# EAGLE board A T Junction Box V1_0 (EAGLE 8.4.0)
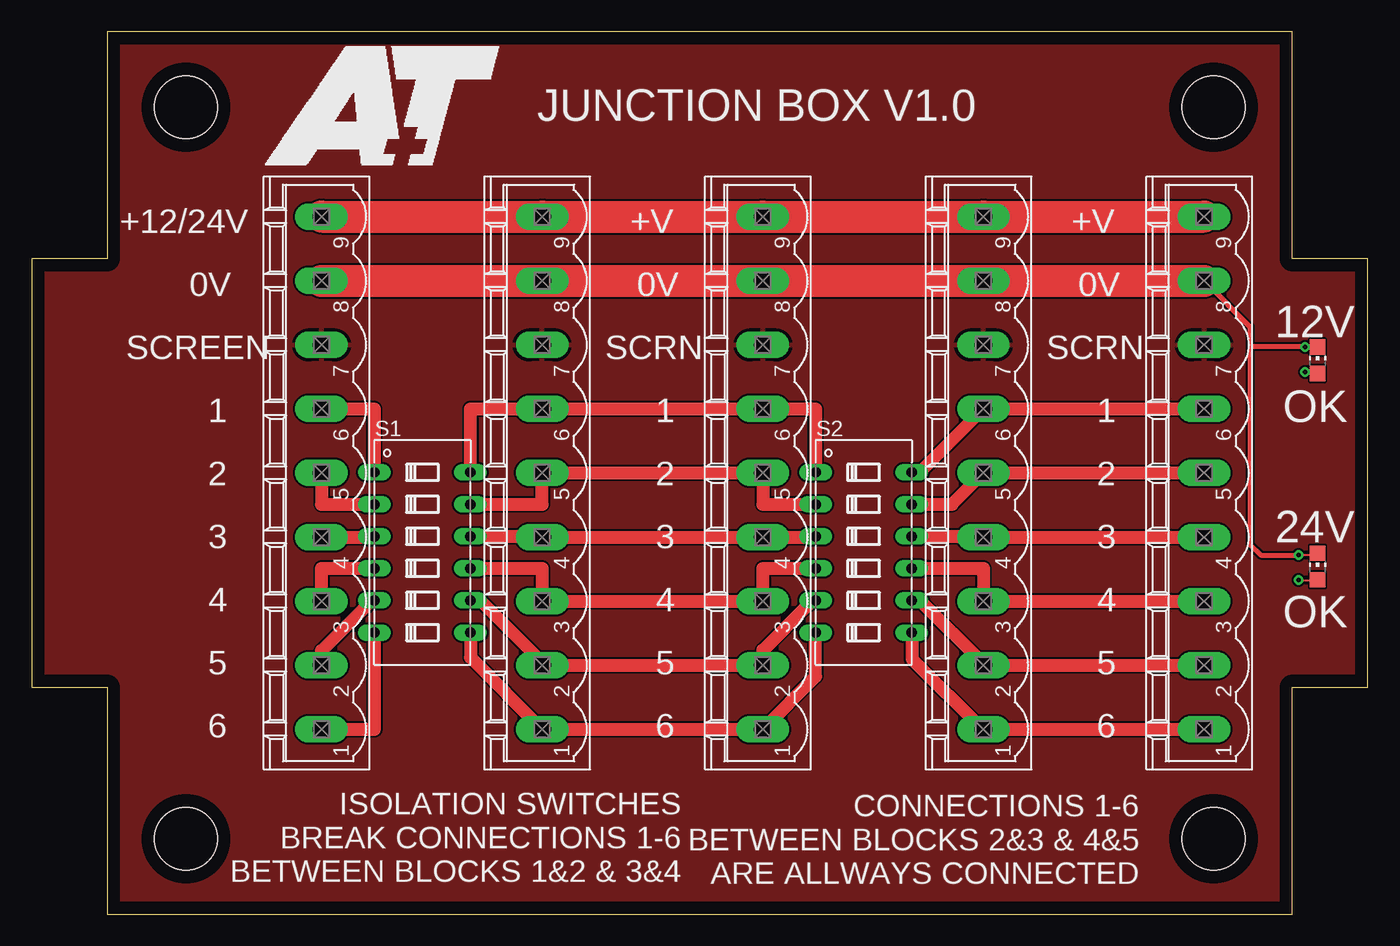
[diagram p0: board, top side]
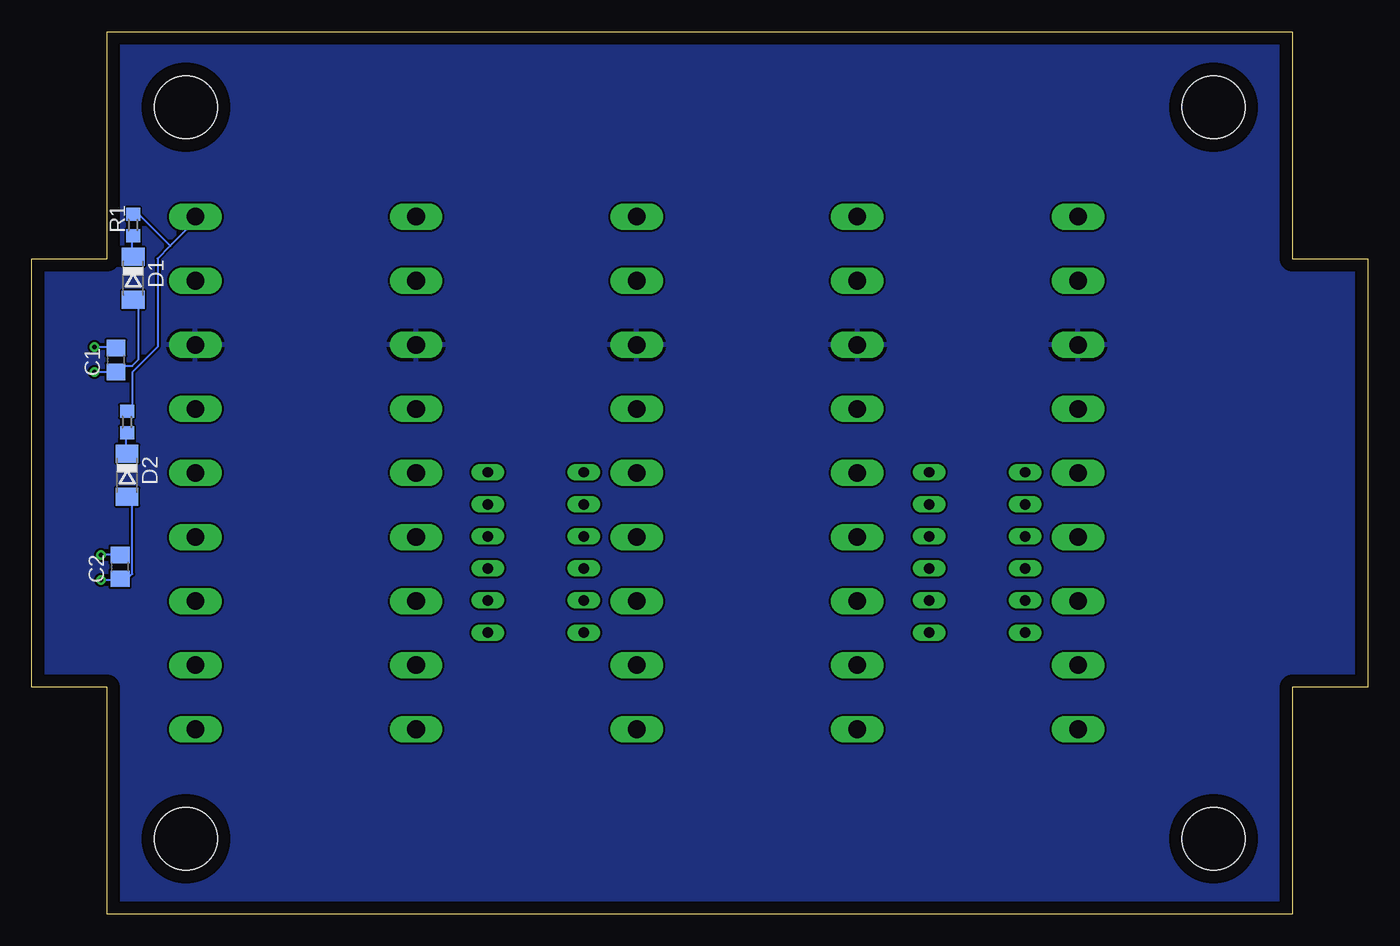
[diagram p1: board, bottom side, seen from below]

Size 106 x 70 mm. Coordinates in mm from the lower left corner, seen from the top.
Outline: 6,0 100,0 100,18 106,18 106,52 100,52 100,70 6,70 6,52 0,52 0,18 6,18 6,0
Copper layers (1*16): Top 0.035mm / dielectric 1.5mm / Bottom 0.035mm
Design rules "default": minimum track width 6mil, minimum drill 0.35mm, track to track 6mil, track to pad 6mil, pad to pad 6mil, via to via 6mil, smd to smd 6mil, copper to edge 40mil, drill to drill 6mil, minimum pad ring 10mil, minimum via ring 8mil, stop-mask expansion 4mil, vias tented up to drill 0mil, thermal gap 10mil
Holes 5 mm at 12.25,6 93.75,6 93.75,64 12.25,64

## Footprints (pad centres in the part's own frame; a part is rotated, then mirrored left to right if it is on the bottom)
C0805 = smd 1.3 x 1.5: 1 -0.95,0; 2 0.95,0
SOD80C = smd 1.4 x 1.8: A 1.7,0; C -1.7,0
CHIP-LED0805 = smd 1.2 x 1.2: A 0,-1.05; C 0,1.05
R0603 = smd 1 x 1.1: 1 -0.85,0; 2 0.85,0
DIP06YL = drill 0.813 long: 1 -6.35,-3.81; 2 -3.81,-3.81; 3 -1.27,-3.81; 4 1.27,-3.81; 5 3.81,-3.81; 6 6.35,-3.81; 7 6.35,3.81; 8 3.81,3.81; 9 1.27,3.81; 10 -1.27,3.81; 11 -3.81,3.81; 12 -6.35,3.81
MSTBV9 = drill 1.397 long: 1 -20.32,0; 2 -15.24,0; 3 -10.16,0; 4 -5.08,0; 5 0,0; 6 5.08,0; 7 10.16,0; 8 15.24,0; 9 20.32,0

## Placement (x,y rotation side)
C1  100n 50V  [C0805]  99.3,43.96 90 bottom
C2  100n 50V  [C0805]  98.98,27.56 90 bottom
D1  [SOD80C]  97.94,50.44 270 bottom
D2  [SOD80C]  98.42,34.82 270 bottom
LED1  [CHIP-LED0805]  102,43.94 0 top
LED2  [CHIP-LED0805]  102,27.58 0 top
R1  1k  [R0603]  97.94,54.66 90 bottom
R2  1k  [R0603]  98.42,39.04 90 bottom
S1  [DIP06YL]  31,28.7 270 top
S2  [DIP06YL]  66,28.7 270 top
X1  MSTBV9  [MSTBV9]  23,35 90 top
X2  MSTBV9  [MSTBV9]  40.5,35 90 top
X3  MSTBV9  [MSTBV9]  58,35 90 top
X4  MSTBV9  [MSTBV9]  75.5,35 90 top
X5  MSTBV9  [MSTBV9]  93,35 90 top

## Library data of the parts
C1 C2 R1 R2 = rcl
D1 D2 = diode
LED1 LED2 = led
S1 S2 = switch-dil; OC_FARNELL: unknown; OC_NEWARK: unknown
X1-X5 = con-phoenix-508; MF: FARNELL; MPN: MSTBVA2,5/9-5,08; OC_FARNELL: 3705328; OC_NEWARK: 71C4149

## Nets
GND: C1.2 C2.2 LED1.C LED2.C X1.8 X2.8 X3.8 X4.8 X5.8
N$1: S1.7 S2.6 X2.1 X3.1
N$2: S1.8 S2.5 X2.2 X3.2
N$3: S1.9 S2.4 X2.3 X3.3
N$4: S1.10 S2.3 X2.4 X3.4
N$5: S1.11 S2.2 X2.5 X3.5
N$6: S1.12 S2.1 X2.6 X3.6
N$8: S1.3 X1.4
N$9: R1.2 R2.2 X1.9 X2.9 X3.9 X4.9 X5.9
N$10: S2.7 X4.1 X5.1
N$11: S2.8 X4.2 X5.2
N$12: S2.9 X4.3 X5.3
N$15: S2.12 X4.6 X5.6
N$16: S1.6 X1.1
N$17: S1.5 X1.2
N$18: S1.4 X1.3
N$19: S2.11 X4.5 X5.5
N$20: S1.2 X1.5
N$21: S1.1 X1.6
N$22: C1.1 D1.A LED1.A
N$23: D1.C R1.1
N$24: C2.1 D2.A LED2.A
N$25: D2.C R2.1
N$26: S2.10 X4.4 X5.4
SCREEN: X1.7 X2.7 X3.7 X4.7 X5.7

## Tracks (layer width: path | path; a pad name or v marks a point on that pad's centre or on a via)
GND  (via drill 0.35)
  Top 0.152: v100.5,28.5 101.5,28.5 LED2.C 101.5,29 | v101,45 LED1.C
  Top 0.406: X5.8 96.64,46.6 96.64,45.12 | v101,45 96.76,45 96.64,45.12 | 96.64,45.12 96.64,29.36 97.52,28.48 100.48,28.48 v100.5,28.5
  Top 2.54: X1.8 X2.8 X3.8 X4.8 X5.8
  Bottom 0.152: v100.5,28.5 99,28.5 C2.2 | v101,45 99.5,45 C1.2
N$1
  Top 1.016: S1.7 34.81,20.37 X2.1 X3.1 62.19,18.87 S2.6
N$2
  Top 1.016: S1.8 35.59,24.89 40.5,19.98 X2.2 X3.2 58,20.96 61.6,24.56 61.6,24.8 62.1,24.8 S2.5
N$3
  Top 1.016: S1.9 40.5,27.43 X2.3 X3.3 58,27.44 S2.4
N$4
  Top 1.016: S1.10 40.5,29.97 X2.4 X3.4 62.19,29.92 S2.3
N$5
  Top 1.016: S1.11 40.5,32.51 X2.5 X3.5 58,32.51 S2.2
N$6
  Top 1.016: S1.12 34.81,40.08 X2.6 X3.6 62.19,40.08 S2.1
N$8
  Top 1.016: X1.4 27.19,29.92 S1.3
N$9
  Top 2.54: X1.9 X2.9 X3.9 X4.9 X5.9
  Bottom 0.152: 95,53 93,55 X5.9 | 95,53 96,52 96,45 98,43 98,40 R2.2 | 95,53 97.5,55.5 R1.2
N$10
  Top 1.016: S2.7 69.84,22.32 69.84,20.24 75.4,14.68 X4.1 X5.1
N$11
  Top 1.016: S2.8 70.48,24.88 75.5,19.86 X4.2 X5.2
N$12
  Top 1.016: S2.9 75.5,27.43 X4.3 X5.3
N$15
  Top 1.016: S2.12 70.47,35.05 X4.6 X5.6
N$16
  Top 1.016: X1.1 27.2,14.68 S1.6
N$17
  Top 1.016: X1.2 23,20.92 26.48,24.4 26.48,24.89 S1.5
N$18
  Top 1.016: X1.3 23,27.43 S1.4
N$19
  Top 1.016: S2.11 73.01,32.51 X4.5 X5.5
N$20
  Top 1.016: X1.5 23,32.51 S1.2
N$21
  Top 1.016: X1.6 27.19,40.08 S1.1
N$22  (via drill 0.35)
  Top 0.152: v101,43 102,43 LED1.A
  Bottom 0.152: v101,43 99.5,43 C1.1 99,43.5 98,43.5 97.5,44 97.5,48.5 D1.A
N$23
  Bottom 0.152: R1.1 98,53.5 98,52.5 D1.C
N$24  (via drill 0.35)
  Top 0.152: v100.5,26.5 101.5,26.5 LED2.A
  Bottom 0.152: v100.5,26.5 99,26.5 C2.1 98.5,26.5 98,27 98,33 D2.A
N$25
  Bottom 0.152: R2.1 98.5,38 98.5,37 D2.C
N$26
  Top 1.016: S2.10 75.5,29.97 X4.4 X5.4
SCREEN
  pour Top: 99.92,69.92 99.76,51.84 105.84,51.84 105.84,18.08 105.76,18.08 105.76,18 99.92,18 100,0.08 6,0.08 6,18 0.08,18 0.08,52.08 6.16,52.08 6.16,69.92
  pour Bottom: 99.68,69.84 99.84,69.68 99.84,51.84 105.92,51.84 105.92,18.16 99.76,18.16 99.84,0.16 6.24,0.24 6.24,18.24 0.16,18.24 0.16,51.36 0.56,51.76 6.08,52 6.24,69.76 6.24,69.84

## Text on the board
tNames: JUNCTION BOX V1.0 | +12/24V | +V | +V | 0V | 0V | 0V | 12V | SCREEN | SCRN | SCRN | 1 | 1 | 1 | OK | 2 | 2 | 2 | 24V | 3 | 3 | 3 | 4 | 4 | 4 | OK | 5 | 5 | 5 | 6 | 6 | 6 | ISOLATION SWITCHES / BREAK CONNECTIONS 1-6 / BETWEEN BLOCKS 1&2 & 3&4 | CONNECTIONS 1-6 / BETWEEN BLOCKS 2&3 & 4&5 / ARE ALLWAYS CONNECTED